# Altium PCB PCB_E32_Transmission_V1.1.PcbDoc
Units mm, origin at the board's own origin, x right, y up, seen from the top; angles counter-clockwise.
Board outline 78.49 x 98.04 mm, 2 copper layers (Top Layer, Bottom Layer); 16 components, 17 nets, 85 pads, 0 vias.
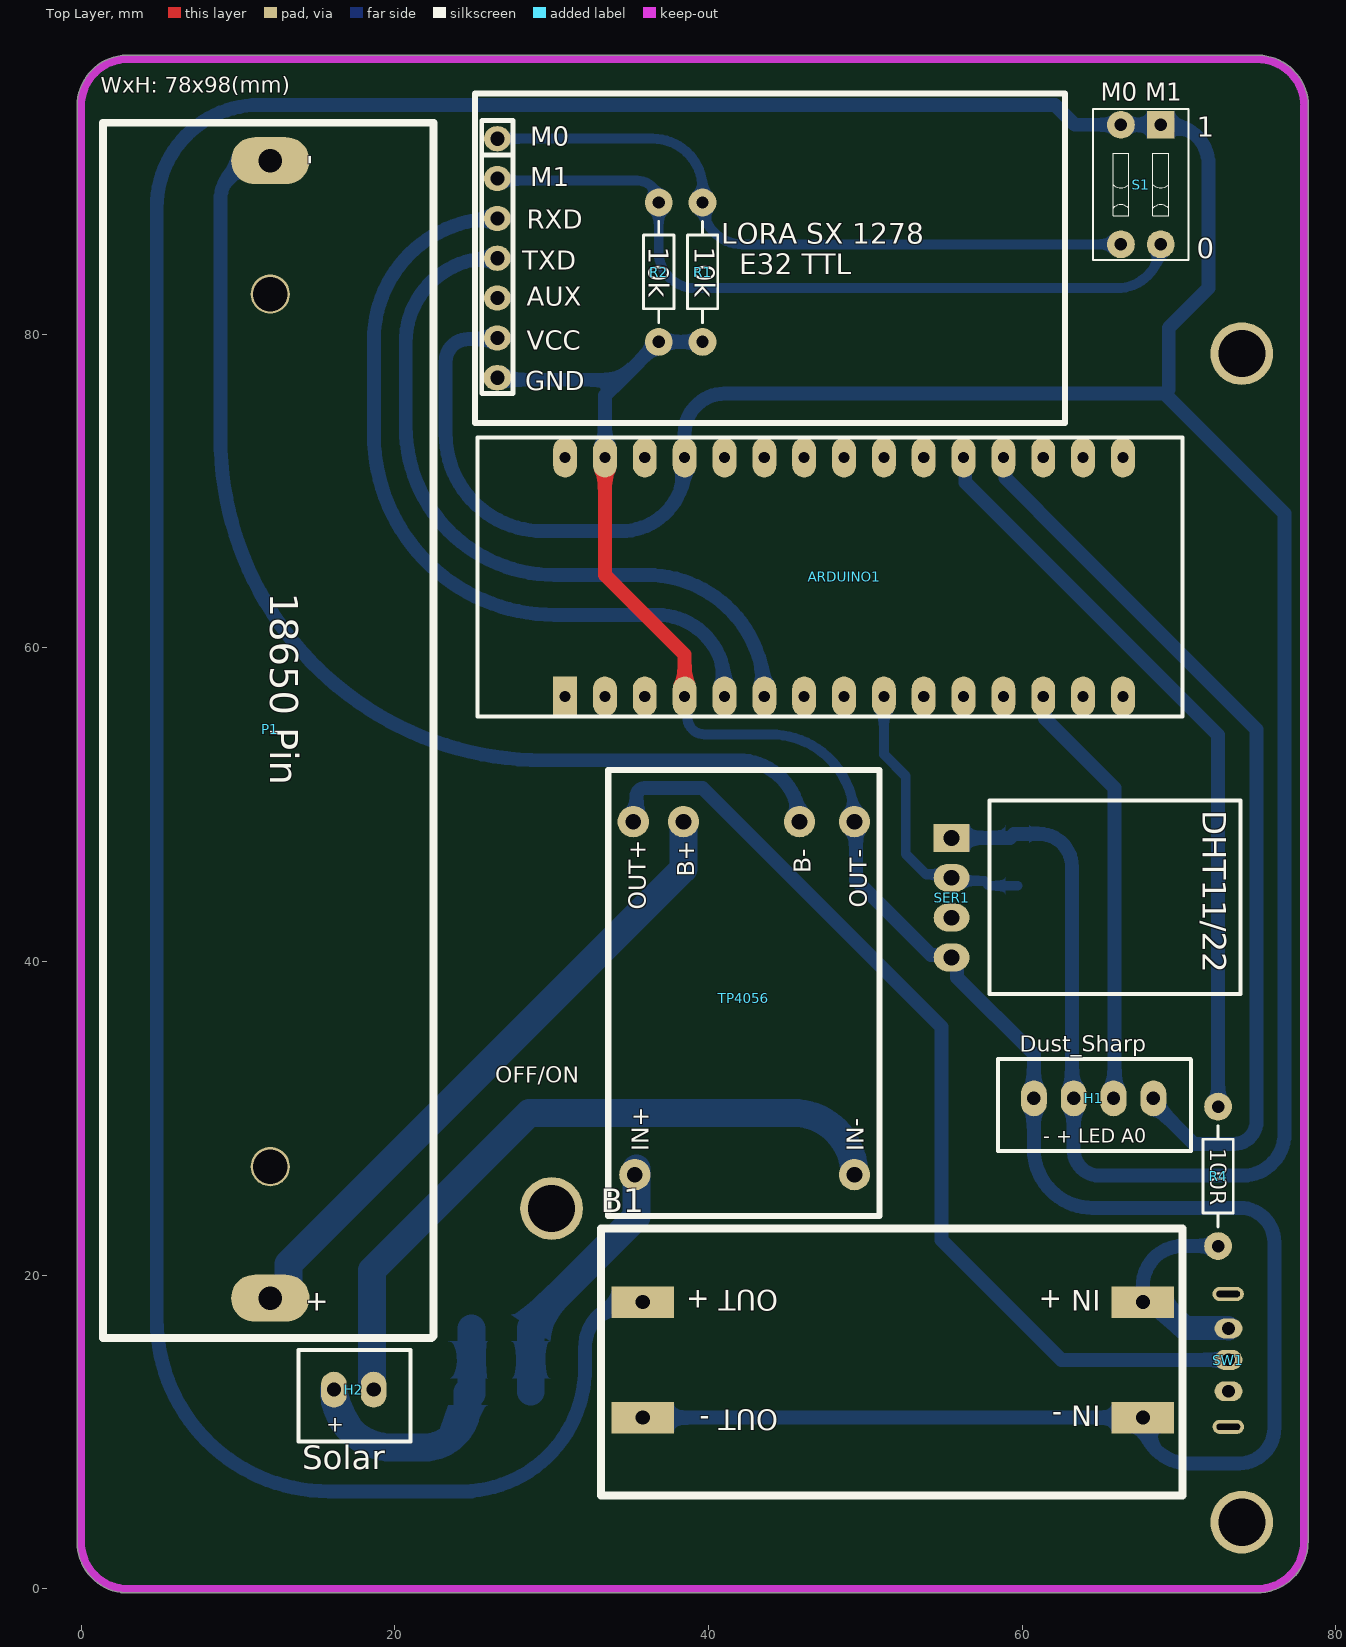
[diagram p0: Top Layer view]
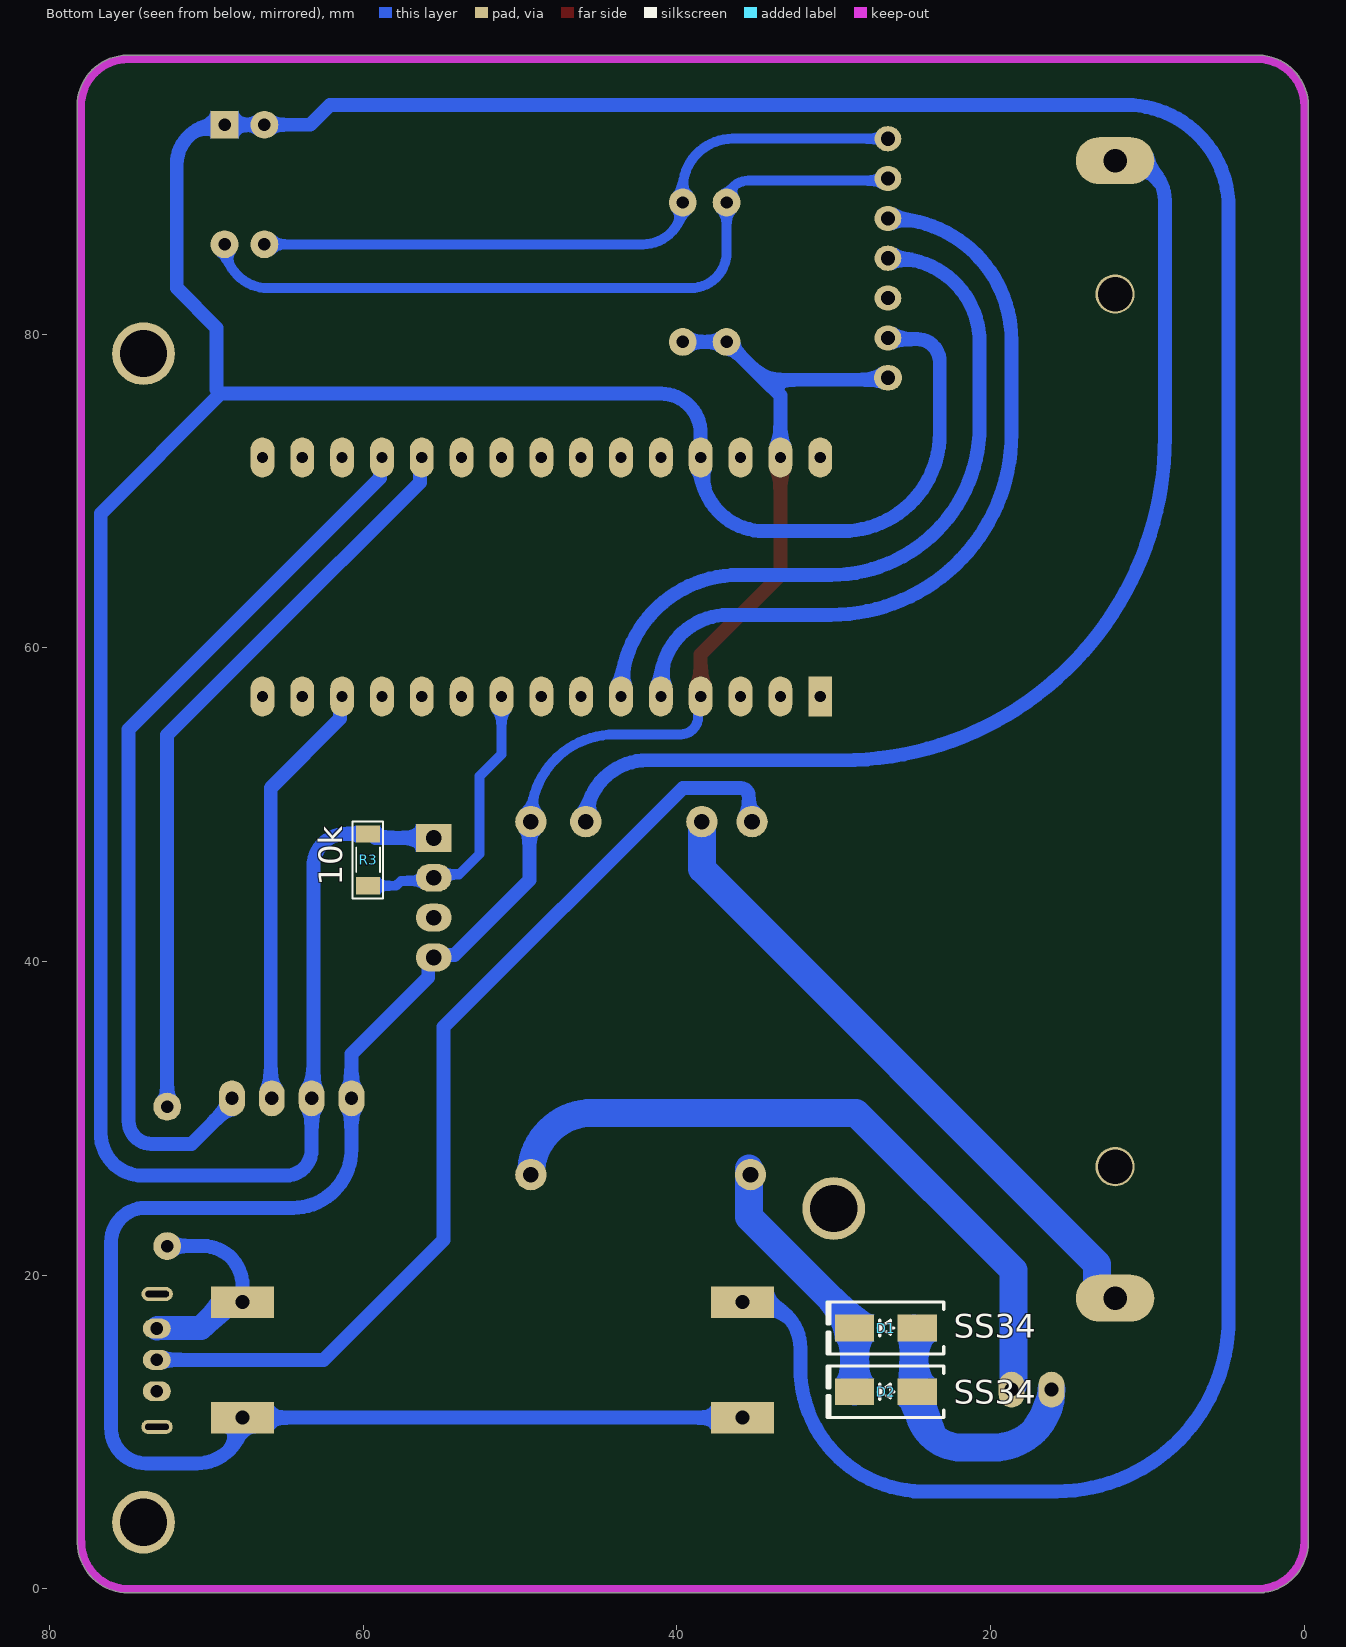
[diagram p1: Bottom Layer view, seen from below]
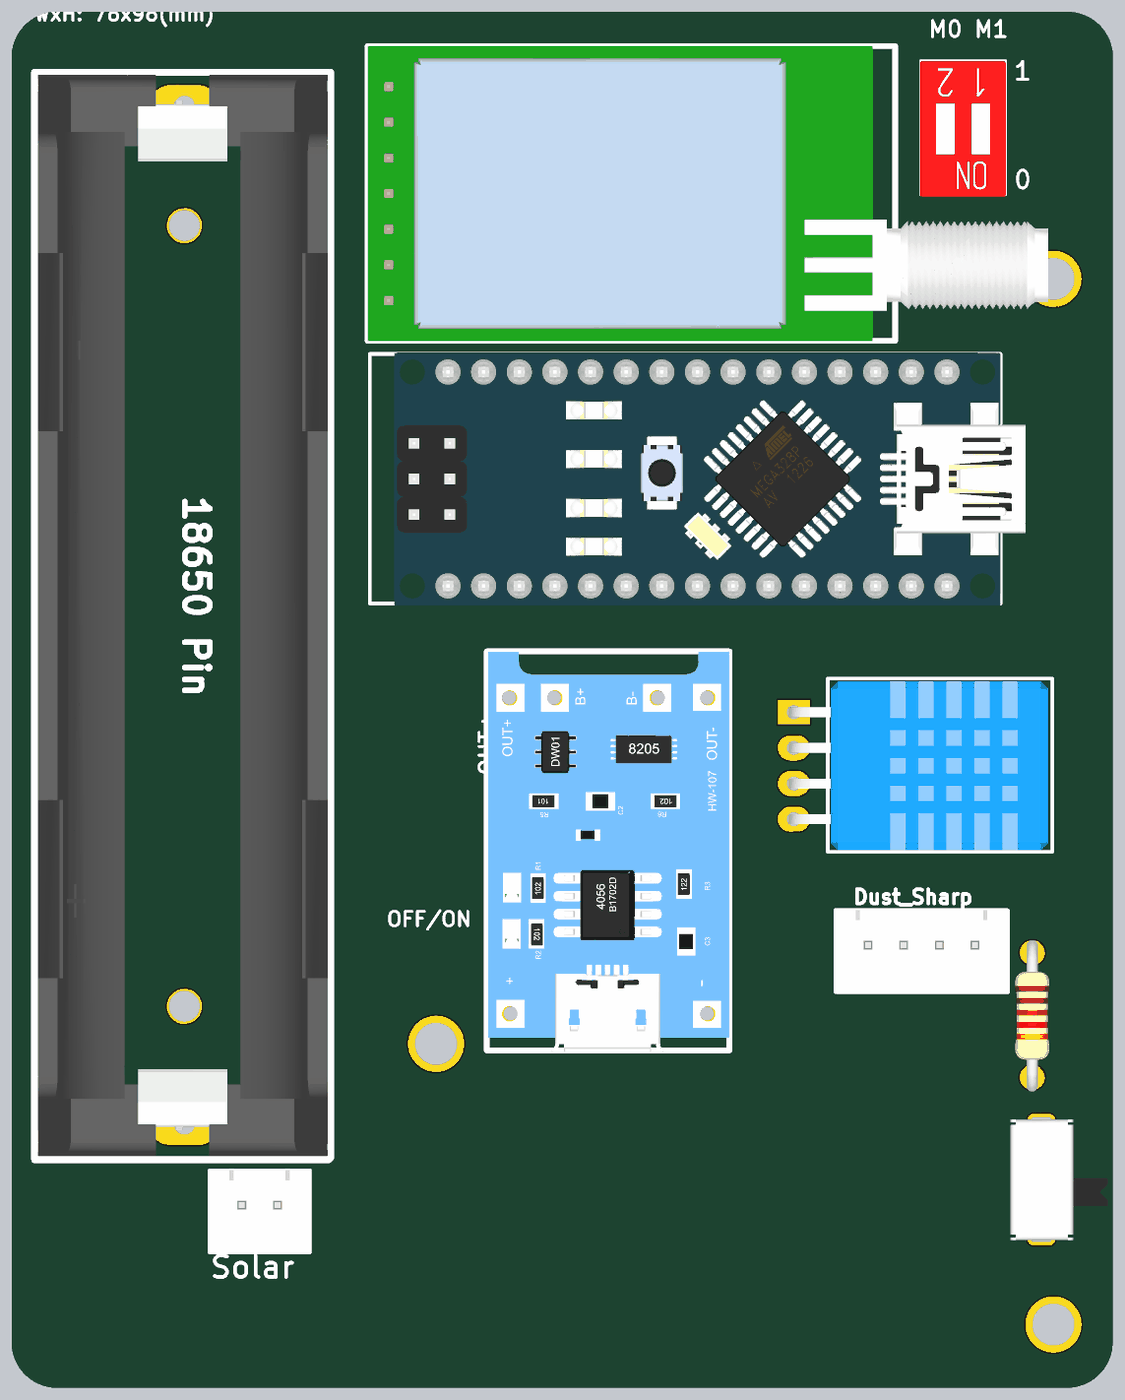
[diagram p2: 3D render of the assembled board from above, using the file's embedded part models]
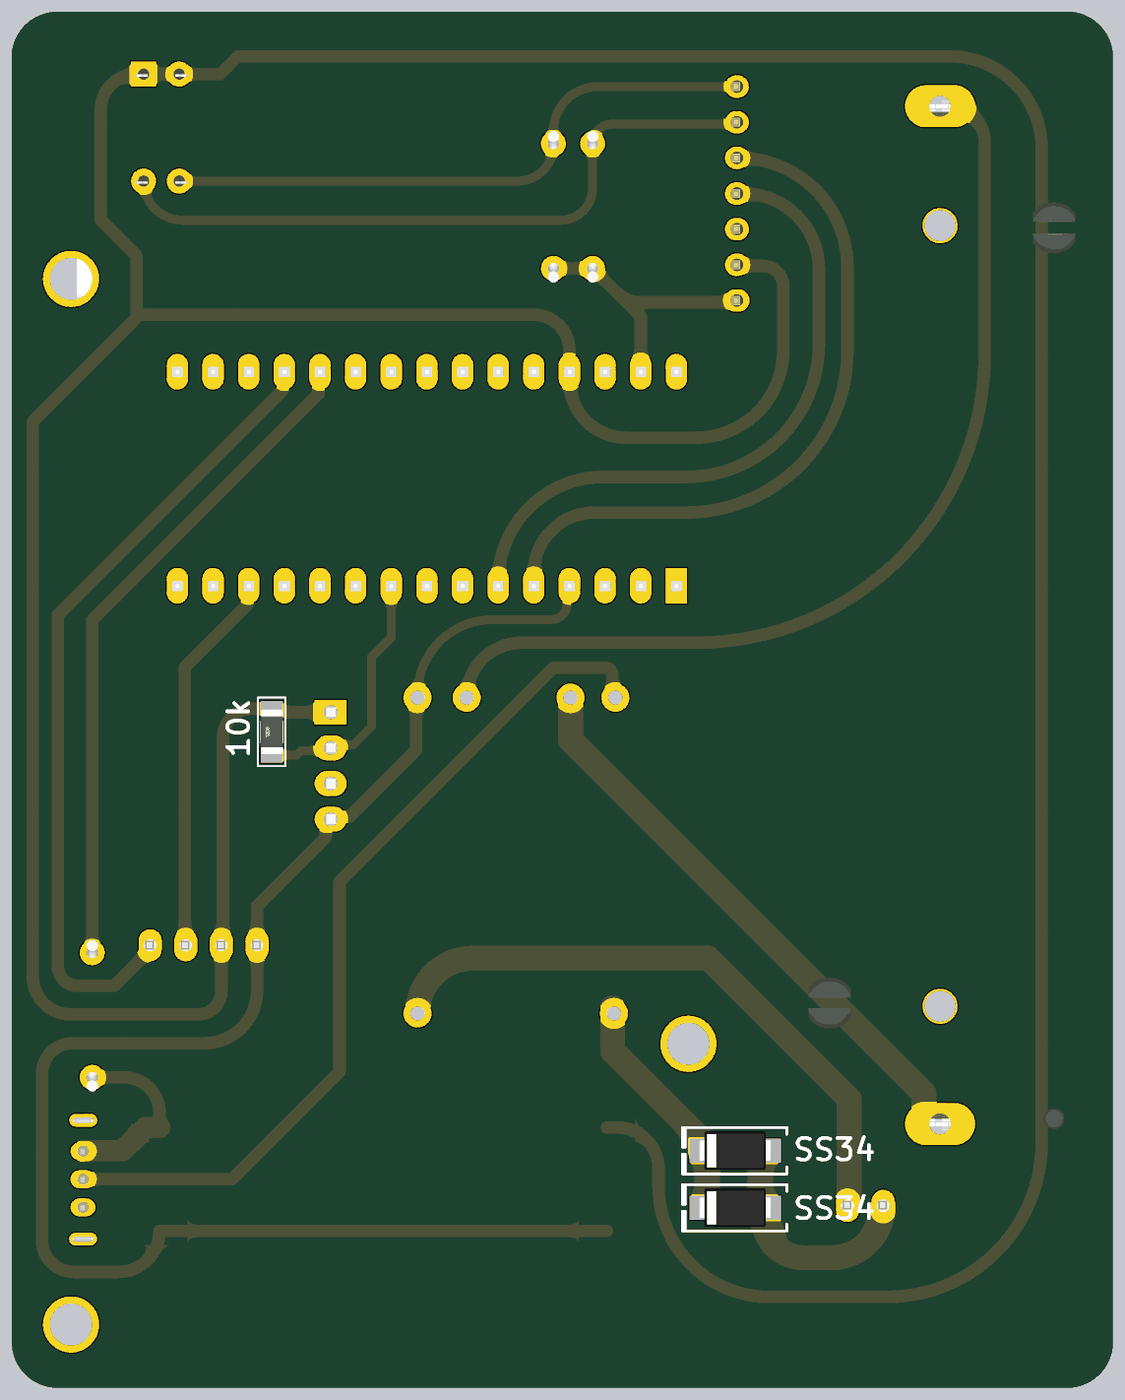
[diagram p3: 3D render of the assembled board from below, using the file's embedded part models]

## Layer stack, top to bottom
Top Solder: solder mask 0.0102, Solder Resist, Dk 3.5
Top Layer: signal copper 0.0356
Dielectric 1: dielectric 0.32, FR-4, Dk 4.8
Bottom Layer: signal copper 0.0356
Bottom Solder: solder mask 0.0102, Solder Resist, Dk 3.5

## Board outline
-0.254,2.997 cw(c0,3) -0.254,3 -0.254,94.536 cw(c0,94.536) -0.254,94.54 cw(c3,94.536) 2.898,97.789 cw(c2.926,97.536) 2.926,97.79 74.979,97.79 cw(c74.979,97.536) 75.036,97.784 cw(c74.986,94.53) 78.24,94.53 cw(c77.986,94.53) 78.232,94.469 78.232,3.013 cw(c77.978,3.013) 78.218,2.93 cw(c74.965,3) 74.965,-0.254 2.667,-0.254 cw(c2.667,0) 2.543,-0.222 cw(c3,3)

## Design rules (kind name [scope] priority, off if disabled: settings)
Clearance [All] p1: gap=0.508 ignorepadtopadclearanceinfootprint=FALSE
PolygonConnect [All] p1: connectstyle=Relief reliefconductorwidth=0.254 reliefentries=4 polygonreliefangle="90 Angle" airgapwidth=0.254
RoutingVias [All] p1: holewidth=0.711 width=1.27 viastyle="Through Hole" minholewidth=0.711 minwidth=1.27 maxholewidth=0.711 maxwidth=1.27
SolderMaskExpansion [All] p1: expansion=0.102 istentingtop=FALSE
Width [All] p1: maxlimit=1.778 minlimit=0.635 preferedwidth=0.889
30 further rules are at their usual default settings.

## Classes and differential pairs
component class Sheet_LoraE32_Transmission_V1.1: ARDUINO1 B1 D1 D2 H1 H2 P1 R1 R2 R3 R4 S1 SER1 SW1

## Components (designator, comment, footprint, x,y, rotation, side; value= is the part's Value field where it differs from the comment)
ARDUINO1 "ARDUINO NANO" "ARDUINO PRO NANO" 70.231,55.626 r90 top
B1 "Boost 2A" "PCB_Boost 2A" 104.521,24.765 r180 top
D1 "SS34" "DIODE SMA" 26.67,16.637 r0 bottom
D2 "SS34" "DIODE SMA" 26.67,12.573 r0 bottom
H1 "Dust_Sharp" "Header 4P 2.54" 68.365,31.276 r180 top
H2 "Solar" "Header 2P 2.54" 17.399,12.446 r180 top
P1 "" "Pin 18650 x1 loai 1" 1.524,93.726 r270 top
R1 "10k" R1/4W 39.624,79.502 r90 top
R2 "10k" R1/4W 36.83,79.502 r90 top
R3 "10k" RES-1206 59.69,44.831 r90 bottom
R4 "100R" R1/4W 72.492,21.858 r90 top
S1 "" SW-DIP2 67.564,89.535 r180 top
SER1 "DHT11/22" DHT11_H 55.499,47.879 r270 top
SW1 "CongTacGat" CongTacGat1 78.262,8.285 r90 top
TP4056 "5 -4.2V" TP4056 52.206,8.416 r90 top
? "LORA E32 TTL" "LORA E32 TTL" 24.923,74.216 r0 top

## Footprints (in the part's own frame and the unit in brackets; to place one, negate y for a bottom-side part, rotate by r counter-clockwise, add the part's x,y. Pads: shape width x height; smd on the part's side, far side on the other; paste and mask are expansions set on the pad)
"ARDUINO PRO NANO" [mil]
  rect 100x60 hole 28: 1(50,1550)
  oval 100x60 hole 28: 2(50,1450) 3(50,1350) 4(50,1250) 5(50,1150) 6(50,1050) 7(50,950) 8(50,850) 9(50,750) 10(50,650) 11(50,550) 12(50,450) 13(50,350) 14(50,250) 15(50,150) 16(650,150) 17(650,450) 18(650,550) 19(650,650) 20(650,750) 21(650,1250) 22(650,1350) 23(650,1450) 24(650,1550) 25(650,850) 26(650,950) 27(650,1050) 28(650,1150) 29(650,250) 30(650,350)
  silkscreen extent 0,0 700,1770, body extent -5,-71 704,1701, height 508
CongTacGat1 [mm]
  oval 0.9x2 hole 1.5 slot 0.4 at 0 deg: 0(2.05,5.12) 0(10.52,5.13)
  oval 1.27x1.778 hole 0.8: 1(4.32,5.11) 2(6.32,5.11) 3(8.32,5.11)
  body extent 1.98,0.4 10.58,7.34, height 4.7
DHT11_H [mil]
  rect 70x90 hole 39.37 unplated: 1(0,0)
  oval 70x90 hole 39.37 unplated: 2(100,0) 3(200,0)
  oval 70x90 hole 39.37 unplated mask+4: 4(300,0)
  silkscreen extent -94,95 392,725, body extent -86,-15 386,713, height 217
"DIODE SMA" [mm] "SMA"
  rect 2.5x1.7 smd: 1(-2,0) 2(2,0)
  silkscreen extent -3.68,-1.65 3.75,1.65, body extent -2.6,-1.37 2.6,1.37, height 2.4
"Header 2P 2.54" [mm]
  oval 1.651x2.286 hole 0.9: 1(-1.26,-0.26) 2(1.28,-0.26)
  silkscreen extent -3.61,-2.79 3.55,3.05, body extent -3.64,-2.8 3.58,3.04, height 7.21
"Header 4P 2.54" [mil]
  oval 65x90 hole 33.46: 1(0,0) 2(100,0) 3(200,0) 4(300,0)
  silkscreen extent -94,-98 390,131, body extent -94,-98 390,132, height 284
"LORA E32 TTL" [mm]
  oval 1.8x1.6 hole 0.9: 1(1.62,3)
  oval 1.7x1.6 hole 0.9: 2(1.62,5.54) 3(1.62,8.08) 4(1.62,10.62) 5(1.62,13.16) 6(1.62,15.7) 7(1.62,18.24)
  silkscreen extent 0.2,0.12 37.8,21.12, body extent 0.2,0.12 48.7,21.12, height 12.9
"PCB_Boost 2A" [mm]
  rect 4x2 hole 0.9: 1(68.707,6.477) 2(68.707,13.843) 3(36.83,6.477) 4(36.83,13.843)
  silkscreen extent 34.29,1.78 71.37,18.8, body extent 34.13,1.56 71.28,18.99, height 6.45
"Pin 18650 x1 loai 1" [mm]
  oval 3x5 hole 1.5: 1(2.667,10.541) 2(75.184,10.541)
  round 2.5 hole 2.2: ""(11.176,10.541) ""(66.802,10.541)
  silkscreen extent 0.25,-0.13 77.72,20.96, body extent 0.42,0.09 77.47,20.74, height 15.36
R1/4W [mil] "R 1/4W, 2 Pin, 350mil"
  round 70 hole 31: 1(0,0) 2(350,0)
  silkscreen extent 48,-38 302,38, body extent -40,-47 386,47, height 111
RES-1206 [mm]
  rect 1.1x1.55 smd: 1(0,0) 2(3.302,0)
  silkscreen extent -0.8,-0.97 4.1,1, body extent 0.05,-0.8 3.25,0.8, height 1.02
SW-DIP2 [mil] "02p, 2.54mm Pitch, Horizontal, Box Type, THT, flat Actuator, red, without Tape, Tube"
  rect 70x70 hole 31.5: 1(-50,-150)
  round 70 hole 31.5: 2(50,-150) 3(50,150) 4(-50,150)
  silkscreen extent -120,-189 120,189, body extent -120,-185 120,193, height 213
TP4056 [mm]
  round 2 hole 1: 1(18,16.9) 2(18,2.9) 3(40.5,17) 4(40.5,2.9) 5(40.5,13.8) 6(40.5,6.4)
  silkscreen extent 15.37,1.3 43.8,18.6, body extent 15.23,1.3 43.77,18.5, height 4.22

## Part data
D1 D2: library part "Diode SS34 ( 1N5822 )", "Dán", Chung_Loai=Dán, Don_Vi=Con, Ma_Hang=MH002104, Ten_Linh_Kien="Diode SS34 3A 40V SMA ( 1N5822 SS34A)"
H1: library part "Header 4P"
H2: library part "Header 2P"
P1: library part Pin18650
R1 R2 R4: library part "Res DIP", "Res"
R3: library part "Res SMD", "Res"
S1: library part SWDIP2, "WS-DITV 2.54 mm small compact THT flat actuator with top tape", Manufacturer="Wurth Elektronik", Part No.=418127160902, ComponentLink1 Description=Manufacturer, ComponentLink1URL=http://www.we-online.com, ComponentLink2 Description=Datasheet, ComponentLink2URL=http://katalog.we-online.de/em/datasheet/4181271609xx.pdf, Created by="Baojun Chen", Created Date=Dec.2015, Pole=02
TP4056: library part TP4056

## Free pads (board coordinates)
  round 4 hole 3: 0(30,24.254) 0(74,4.254) 0(74,78.754)

## Nets (pads, with @x,y where several pads share a name; then routed paths per layer and width w, separated by ;. In a path a pad name is that pad's centre, name@x,y a point inside that pad or via, vN(x,y) a via of type N, cw(c..) or ccw(c..) an arc to the next point about the centre after c; other vN are vias at no path point)
5V: ?.2 ARDUINO1.21 B1.1 H1.3 R3.2 S1.1 S1.2 SER1.1 | length 360.5
  Bottom Layer w0.889: ?.2@26.527,79.883 26.327,79.683 24.692,79.683 ccw(c24.692,78.232) 23.241,78.232 23.241,73.66 ccw(c29.464,73.66) 29.464,67.437 34.417,67.437 ccw(c34.417,71.501) 38.481,71.501 ARDUINO1.21 38.481,73.66 cw(c41.021,73.66) 41.021,76.2 69.088,76.2 ; B1.1 35.052,18.288 ccw(c35.052,15.367) 32.131,15.367 32.131,14.097 cw(c24.257,14.097) 24.9,6.249 cw(c24.874,6.249) 24.874,6.223 15.806,6.223 15.803,6.223 cw(c15.803,17.2) 4.826,17.2 4.826,17.203 4.826,88.071 cw(c11.37,88.071) 11.37,94.615 62.103,94.615 63.373,93.345 S1.2 S1.1 69.342,93.345 cw(c69.342,90.805) 71.882,90.805 71.882,82.931 69.342,80.391 69.342,76.454 69.088,76.2 ; SER1.1 59.211,47.879 59.465,48.133 R3.2 61.087,48.133 cw(c61.087,46.045) 63.175,46.045 H1.3@63.175,32.202 ; H1.3 63.285,27.999 ccw(c64.935,27.999) 64.935,26.349 74.043,26.349 ccw(c74.043,29.033) 76.727,29.033 76.727,68.561 69.088,76.2
A0_Dust: ARDUINO1.17 H1.1 | length 57.4
  Bottom Layer w0.889: ARDUINO1.17@58.72,71.678 58.923,71.475 58.923,70.83 63.154,66.598 74.946,54.807 74.946,29.819 cw(c73.505,29.819) 73.505,28.379 70.952,28.379 68.365,30.966 H1.1
A1_Vol: ARDUINO1.18 R4.2 | length 48.1
  Bottom Layer w0.889: ARDUINO1.18 56.371,72.026 56.371,70.553 66.439,60.484 72.492,54.432 R4.2
DATA_DHT: ARDUINO1.9 R3.1 SER1.2 | length 17.4
  Bottom Layer w0.635: ARDUINO1.9@51.181,55.753 51.181,53.213 52.578,51.816 52.578,46.863 53.883,45.558 55.28,45.558 SER1.2 55.7,45.138 57.594,45.138 57.901,44.831 R3.1
E32_RX: ?.5 ARDUINO1.5 | length 50.4
  Bottom Layer w0.889: ?.5 26.435,87.376 ccw(c26.435,79.61) 18.669,79.61 18.669,73.623 ccw(c30.189,73.623) 30.189,62.103 36.703,62.103 cw(c36.703,57.785) 41.021,57.785 ARDUINO1.5@41.021,57.023
E32_TX: ?.4 ARDUINO1.6 | length 47
  Bottom Layer w0.889: ?.4 26.069,84.836 ccw(c26.069,79.468) 20.701,79.468 20.701,74.122 ccw(c30.18,74.122) 30.18,64.643 36.058,64.643 cw(c36.058,57.14) 43.561,57.14 ARDUINO1.6
GND: ?.1 ARDUINO1.4 ARDUINO1.23 B1.2 B1.4 H1.4 R1.1 R2.1 SER1.4 TP4056.4 | length 152.9
  Top Layer w0.889: ARDUINO1.23 33.401,64.643 38.481,59.563 ARDUINO1.4
  Bottom Layer w0.635: ARDUINO1.4 38.651,56.726 38.651,55.583 ccw(c39.751,55.583) 39.751,54.483 43.942,54.483 cw(c43.942,49.119) 49.306,49.119 TP4056.4
  Bottom Layer w0.889: ?.1@26.561,77.089 34.417,77.089 ; ARDUINO1.23 33.401,76.073 34.417,77.089 ; B1.2 B1.4 ccw(c70.612,10.922) 70.612,8.001 73.813,8.001 ccw(c73.813,10.261) 76.073,10.261 76.073,22.101 ccw(c73.876,22.101) 73.876,24.298 64.483,24.298 cw(c64.483,28.036) 60.745,28.036 H1.4 60.745,34.096 55.85,38.991 55.85,39.908 55.329,40.429 54.186,40.429 49.403,45.212 TP4056.4@49.403,49.119 ; R1.1 R2.1 34.417,77.089
LED_Dust: ARDUINO1.13 H1.2 | length 27.9
  Bottom Layer w0.889: ARDUINO1.13 61.463,56.774 61.463,55.504 65.89,51.077 H1.2@65.89,30.904
Net_6: ?.6 R2.2 S1.4 | length 49.1
  Bottom Layer w0.635: ?.6@26.57,89.789 35.433,89.789 cw(c35.433,88.392) R2.2 36.83,85.217 ccw(c39.116,85.217) 39.116,82.931 66.04,82.931 ccw(c66.04,85.725) S1.4
Net_7: ?.7 R1.2 S1.3 | length 44
  Bottom Layer w0.635: ?.7 36.449,92.456 cw(c36.449,89.281) 39.624,89.281 R1.2 39.624,88.265 ccw(c42.164,88.265) 42.164,85.725 S1.3
NetB1_3: B1.3 R4.1 SW1.3 | length 13.6
  Bottom Layer w0.889: B1.3 67.691,19.326 cw(c70.231,19.326) 70.231,21.866 72.589,21.866 R4.1@72.612,21.844
  Bottom Layer w1.524: B1.3 68.691,18.288 70.342,16.637 73.12,16.637 SW1.3
NetD1_1: D1.1 D2.1 H2.2 | length 17.1
  Bottom Layer w1.778: H2.2 ccw(c19.809,12.706) 19.809,9.016 21.844,9.016 ccw(c21.843,11.811) 24.638,11.811 24.638,12.541 D2.1 ; D2.1@24.892,12.446 D1.1@24.892,16.597
NetD1_2: D1.2 D2.2 TP4056.1 | length 17.2
  Bottom Layer w1.778: D2.2 D1.2 28.992,16.637 29.031,16.676 29.031,17.347 35.403,23.719 TP4056.1@35.403,26.797
NetH2_1: H2.1 TP4056.2 | length 44.4
  Bottom Layer w1.778: H2.1@18.542,13.067 18.542,20.32 28.575,30.353 45.369,30.353 cw(c45.369,26.416) TP4056.2
NetP1_1: P1.1 TP4056.6 | length 70.6
  Bottom Layer w0.889: P1.1 11.43,91.059 ccw(c11.43,88.519) 8.89,88.519 8.89,73.406 ccw(c29.464,73.406) 29.464,52.832 41.89,52.832 cw(c41.89,48.916) TP4056.6
NetP1_2: P1.2 TP4056.5 | length 41.6
  Bottom Layer w1.778: P1.2 12.655,18.542 13.219,19.106 13.219,20.725 38.406,45.911 TP4056.5
NetSW1_2: SW1.2 TP4056.3 | length 62.8
  Bottom Layer w0.889: TP4056.3 35.419,49.129 35.419,50.533 cw(c35.939,50.533) 35.939,51.054 39.624,51.054 54.864,35.814 54.864,22.254 62.513,14.605 SW1.2
pads on no net: ?.3 ARDUINO1.1 ARDUINO1.2 ARDUINO1.3 ARDUINO1.7 ARDUINO1.8 ARDUINO1.10 ARDUINO1.11 ARDUINO1.12 ARDUINO1.14 ARDUINO1.15 ARDUINO1.16 ARDUINO1.19 ARDUINO1.20 ARDUINO1.22 ARDUINO1.24 ARDUINO1.25 ARDUINO1.26 ARDUINO1.27 ARDUINO1.28 ARDUINO1.29 ARDUINO1.30 P1. SER1.3 SW1.0 SW1.1

## Keep-outs
Keep-Out Layer:
  lines w0.508: 2.926,97.536 74.986,97.536 ; 3,97.536 ccw(c3,94.536) 0,94.536 0,3 ccw(c3,3) 3,0 74.965,0 ccw(c74.965,3) 77.965,3 ; 74.986,97.53 cw(c74.986,94.53) 77.986,94.53 ; 77.978,3.013 77.978,94.538

## Silkscreen, mask and mechanical layers (free items; w line width, h text height)
Top Overlay:
  text "WxH: 78x98(mm)" at 1.27,95.377 h1
  text "M0 M1" at 65.024,94.869 h1.14
  text "1" at 71.12,92.583 h1.27
  text "0" at 71.12,84.836 h1.27
  text "OFF/ON" at 26.416,32.258 h1.02
  text "- + LED A0" at 61.341,28.448 h0.89
  text "+" at 15.621,10.033 h1

## Text inside footprints (layer, text, board x,y; h text height)
B1: Top Overlay "IN -" at 65.024,11.684 h1.3 r180; Top Overlay "IN +" at 65.024,19.05 h1.3 r180; Top Overlay "OUT -" at 44.45,11.43 h1.3 r180; Top Overlay "OUT +" at 44.45,19.05 h1.3 r180
P1: Top Overlay "18650 Pin" at 12.065,63.5 h1.8 r270; Top Overlay "+" at 14.478,19.05 h1.3 r270; Top Overlay "-" at 14.097,91.44 h1.3 r270
TP4056: Top Overlay "IN-" at 49.906,27.916 h1.1 r90; Top Overlay "B+" at 39.106,45.416 h1.1 r90; Top Overlay "B-" at 46.506,45.616 h1.1 r90; Top Overlay "OUT+" at 36.006,43.316 h1.1 r90; Top Overlay "OUT-" at 50.106,43.416 h1.1 r90; Top Overlay "IN+" at 36.206,27.916 h1.1 r90
?: Top Overlay "M0" at 28.623,92.016 h1.2; Top Overlay "M1" at 28.623,89.416 h1.2; Top Overlay "RXD" at 28.423,86.716 h1.2; Top Overlay "TXD" at 28.123,84.116 h1.2; Top Overlay "AUX" at 28.423,81.816 h1.2; Top Overlay "VCC" at 28.423,79.016 h1.2; Top Overlay "GND" at 28.323,76.416 h1.2; Top Overlay "LORA SX 1278  /   E32 TTL" at 40.823,83.816 h1.3